# Altium PCB PCB6.pcbdoc
Units mm, origin at the board's own origin, x right, y up, seen from the top; angles counter-clockwise.
Board outline 54.88 x 39.8 mm, 2 copper layers (Top Layer, Bottom Layer); 33 components, 34 nets, 149 pads, 127 vias.
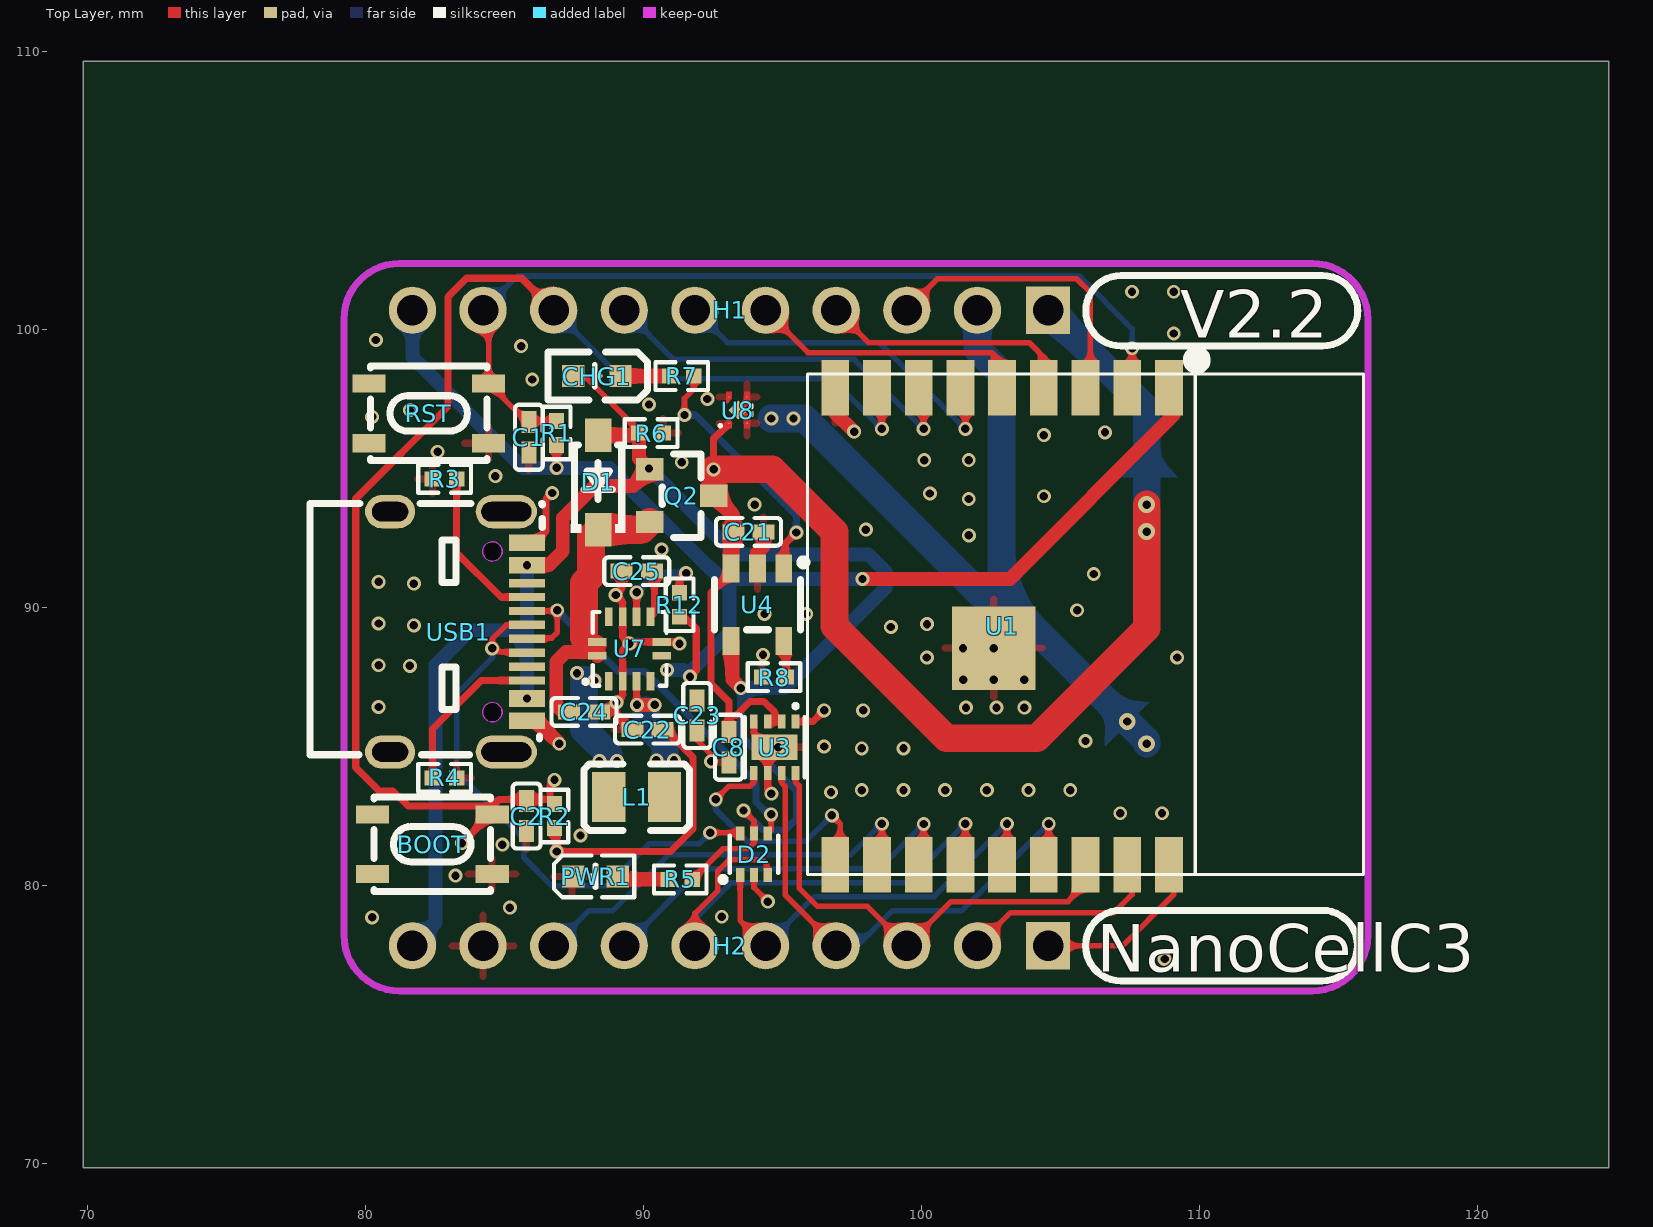
[diagram p0: Top Layer view]
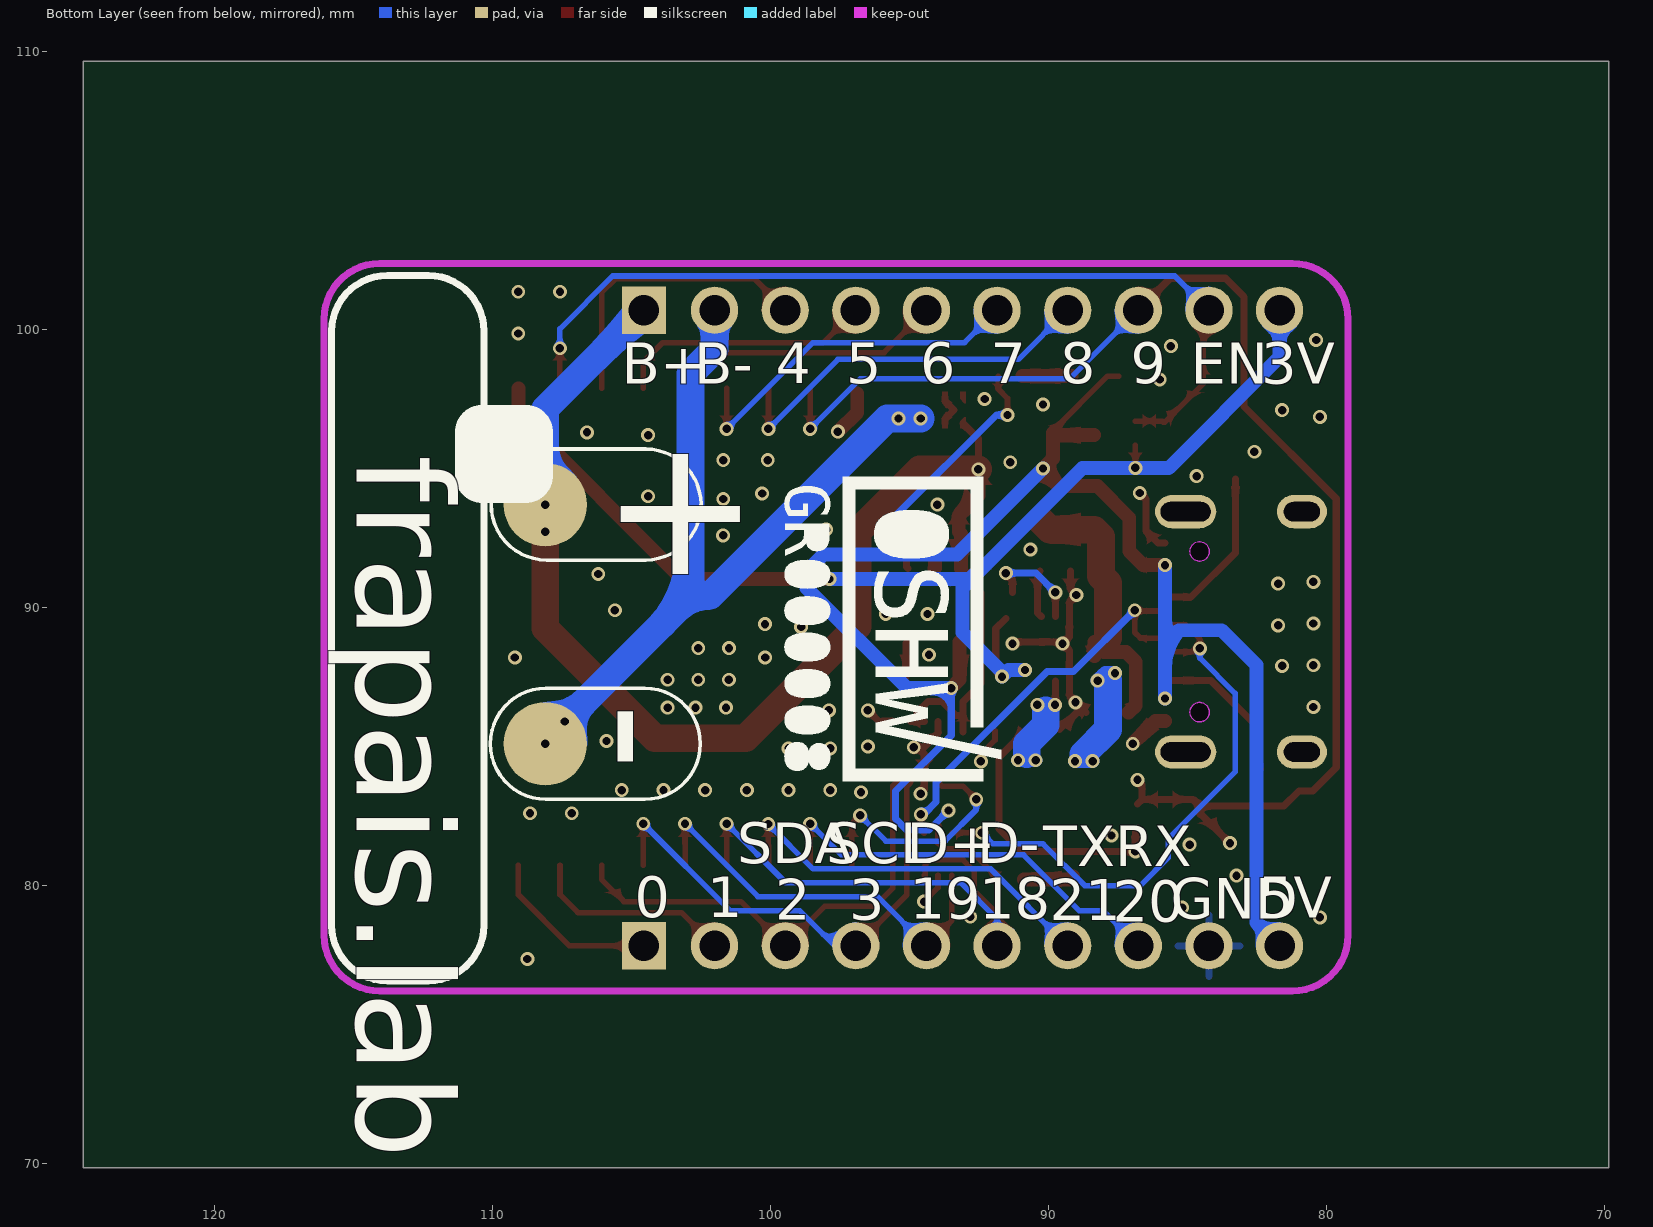
[diagram p1: Bottom Layer view, seen from below]

## Layer stack, top to bottom
Top Layer: signal copper (thickness not stored)
Dielectric: dielectric 0.32, FR-4, Dk 4.8
Bottom Layer: signal copper (thickness not stored)

## Board outline
124.731,69.85 69.85,69.85 69.85,109.65 124.731,109.65

## Design rules (kind name [scope] priority, off if disabled: settings)
BoardOutlineClearance copperThickness1oz [All] p0: genericclearance=0.254 ignorepadtopadclearanceinfootprint=FALSE except(0: Arc-SplitContinuation Track-SplitContinuation SMDPad-SplitContinuation THPad-SplitContinuation Via-SplitContinuation Fill-SplitContinuation Poly-SplitContinuation Region-SplitContinuation Text-SplitContinuation; 0.152: SMDPad-CutoutEdge THPad-CutoutEdge Via-CutoutEdge Fill-CutoutEdge Region-CutoutEdge; 0.3: Track-OutlineEdge SMDPad-OutlineEdge THPad-OutlineEdge Via-OutlineEdge Fill-OutlineEdge Region-OutlineEdge Poly-OutlineEdge Text-OutlineEdge Track-CutoutEdge)
BoardOutlineClearance copperThickness2oz [All] p0: genericclearance=0.254 ignorepadtopadclearanceinfootprint=FALSE except(0: Arc-SplitContinuation Track-SplitContinuation SMDPad-SplitContinuation THPad-SplitContinuation Via-SplitContinuation Fill-SplitContinuation Poly-SplitContinuation Region-SplitContinuation Text-SplitContinuation; 0.152: SMDPad-CutoutEdge THPad-CutoutEdge Via-CutoutEdge Fill-CutoutEdge Region-CutoutEdge; 0.3: Track-OutlineEdge SMDPad-OutlineEdge THPad-OutlineEdge Via-OutlineEdge Fill-OutlineEdge Region-OutlineEdge Poly-OutlineEdge Text-OutlineEdge Track-CutoutEdge)
Clearance copperThickness1oz [(InNet('GND') OR InNet('VCC') OR InNet('RX') OR InNet('TX') OR InNet('D-') OR InNet('D+') OR InNet('SCL') OR InNet('SDA') OR InNet('D01') OR InNet('D00') OR InNet('EN') OR InNet('D09') OR InNet('D08') OR InNet('D07') OR InNet('D06') OR InNet('D05') OR InNet('D04') OR InNet('B-') OR InNet('VBAT') OR InNet('ALRT') OR InNet('CHG2') OR InNet('VIN') OR InNet('DN1') OR InNet('DP1') OR InNet('PROG') OR InNet('CHG1') OR InNet('$1N6') OR InNet('$2N592') OR InNet('$2N589') OR InNet('$2N2104') OR InNet('$2N2094') OR InNet('3.3V') OR InNet('$2N2176') OR InNet('$2N2214'))] p1: gap=0.178 ignorepadtopadclearanceinfootprint=FALSE except(0.102: Track-Track; 0.152: Track-SMDPad SMDPad-SMDPad Track-THPad SMDPad-THPad THPad-THPad Track-Via SMDPad-Via THPad-Via Via-Via Track-Fill SMDPad-Fill THPad-Fill Via-Fill Fill-Fill SMDPad-Region THPad-Region Via-Region Fill-Region Region-Region Track-Poly SMDPad-Poly THPad-Poly Via-Poly Fill-Poly Poly-Poly Track-Text SMDPad-Text THPad-Text Via-Text Fill-Text Region-Text Poly-Text Text-Text Track-Hole SMDPad-Hole THPad-Hole Via-Hole Fill-Hole Region-Hole Poly-Hole Text-Hole; 0.3: Track-Region Region-Poly Track-Sheet SMDPad-Sheet THPad-Sheet Via-Sheet Fill-Sheet Region-Sheet Poly-Sheet Text-Sheet Sheet-Hole)
Clearance copperThickness2oz [All] p1: gap=0.178 ignorepadtopadclearanceinfootprint=FALSE except(0.152: Track-SMDPad SMDPad-SMDPad Track-THPad SMDPad-THPad THPad-THPad Track-Via SMDPad-Via THPad-Via Via-Via Track-Fill SMDPad-Fill THPad-Fill Via-Fill Fill-Fill SMDPad-Region THPad-Region Via-Region Fill-Region Region-Region Track-Poly SMDPad-Poly THPad-Poly Via-Poly Fill-Poly Poly-Poly Track-Text SMDPad-Text THPad-Text Via-Text Fill-Text Region-Text Poly-Text Text-Text Track-Hole SMDPad-Hole THPad-Hole Via-Hole Fill-Hole Region-Hole Poly-Hole Text-Hole; 0.203: Track-Track; 0.3: Track-Region Region-Poly Track-Sheet SMDPad-Sheet THPad-Sheet Via-Sheet Fill-Sheet Region-Sheet Poly-Sheet Text-Sheet Sheet-Hole)
DiffPairsRouting differentialPair [All] p1: maxuncoupledlength=10 minlimit=5.9843 maxlimit=5.9843 mostfreqgap=5.9843 toplayer_minwidth=5 toplayer_prefwidth=10 toplayer_maxwidth=100 bottomlayer_minwidth=5 bottomlayer_prefwidth=10 bottomlayer_maxwidth=100
PasteMaskExpansion pasteMaskExpansion [All] p1: expansion=0
PlaneConnect innerPlane [All] p1: planeconnectstyle=Relief reliefexpansion=0.508 reliefentries=4 reliefconductorwidth=0.254 reliefairgap=0.254
PolygonConnect copperRegion [All] p1: connectstyle=Relief reliefentries=4 reliefconductorwidth=10 polygonreliefangle="90 Angle" airgapwidth=10
PolygonConnect copperRegion1 [All] p1: connectstyle=Direct reliefentries=4 reliefconductorwidth=10 polygonreliefangle="90 Angle" airgapwidth=10
RoutingVias viaSize [All] p1: viastyle="Through Hole" holewidth=12.0078 minholewidth=11.811 maxholewidth=248.0314 width=24.0158 minwidth=19.685 maxwidth=393.7008
SolderMaskExpansion solderMaskExpansion [All] p1: useseparateexpansions=TRUE expansion=2.0079 expansionbottom=2.0079
Width copperThickness1oz [All] p1: maxlimit=100 minlimit=5 preferedwidth=10
Width copperThickness2oz [All] p1: maxlimit=100 minlimit=8 preferedwidth=10

## Components (designator, comment, footprint, x,y, rotation, side; value= is the part's Value field where it differs from the comment)
BOOT "TSA016A2518C" SW-SMD_4P-L4.2-W3.3-P2.15-LS4.6 82.412,81.483 r0 top
C1 "0402B104K160NT" C0402 85.882,96.119 r90 top
C2 "0402B104K160NT" C0402 85.805,82.496 r90 top
C8 "0402B104K160NT" C0402 93.075,84.97 r90 top
C21 "CL05A106MQ5NUNC" C0402 93.782,92.719 r180 top
C22 "CL05A106MQ5NUNC" C0402 90.154,85.605 r0 top
C23 "CL05A106MQ5NUNC" C0402 91.932,86.113 r90 top
C24 "CL05A106MQ5NUNC" C0402 87.868,86.24 r180 top
C25 "CC0402KRX7R9BB102" C0402 89.763,91.302 r0 top
CHG1 "MHT192CSCT" LED0603-R-RD_ORANGE 88.332,98.319 r180 top
D1 "B5819W SL" SOD-123_L2.7-W1.6-LS3.7-RD-1 88.376,94.495 r90 top
D2 "USBLC6-2P6" SOT-666-6_L1.6-W1.2-P0.50-LS1.6-BL 93.982,81.119 r0 top
H1 "DZ254R-11-10-63" HDR-TH_10P-P2.54-V-M 93.127,100.689 r180 top
H2 "DZ254R-11-10-63" HDR-TH_10P-P2.54-V-M 93.127,77.829 r180 top
L1 "DFE201610E-1R5M=P2" L0806 89.763,83.174 r180 top
PWR1 "E6C0603CWAY1UDA" LED0603-R-RD_WHITE 88.282,80.319 r0 top
Q2 "AO3401A_C15127" SOT-23_L2.9-W1.3-P1.90-LS2.4-BR 91.382,94.019 r180 top
R1 "RMS04FT1002" R0402 86.882,96.269 r270 top
R2 "RMS04FT1002" R0402 86.805,82.496 r270 top
R3 "0402WGJ0512TCE" R0402 82.855,94.621 r180 top
R4 "0402WGJ0512TCE" R0402 82.855,83.871 r180 top
R5 "0402WGF5100TCE" R0402 91.332,80.219 r180 top
R6 "RMS04FT1002" R0402 90.282,96.269 r180 top
R7 "0402WGF3300TCE" R0402 91.382,98.319 r0 top
R8 "WR04X2321FTL" R0402 94.705,87.496 r0 top
R12 "0402WGF1004TCE" R0402 91.305,90.096 r270 top
RST "TSA016A2518C" SW-SMD_4P-L4.2-W3.3-P2.15-LS4.6 82.285,96.977 r0 top
U1 "ESP32-C3-WROOM-02-N4_C2934560" FOOTPRINT-ESP32-C3-WROOM-02 108.905,97.896 r270 top
U3 "MAX17048G+T10" DFN-8_L2.0-W2.0-P0.50-BL-EP 94.726,84.97 r180 top
U4 "TP4065-4.2V-SOT25-R" SOT-23-5_L3.0-W1.7-P0.95-LS2.8-BR 94.105,90.096 r90 top
U7 "TPS63051RMWR" QFN-12_L2.5-W2.5-P0.50-TL 89.509,88.508 r90 top
U8 "AP6683" DFN-4_L1.0-W1.0-P0.65-BL-EP 93.405,97.096 r0 top
USB1 "U262-161N-4BVC11" USB-3.1-SMD_U262-161N-4BVC11 83.355,89.121 r270 top

## Footprints (in the part's own frame and the unit in brackets; to place one, negate y for a bottom-side part, rotate by r counter-clockwise, add the part's x,y. Pads: shape width x height; smd on the part's side, far side on the other; paste and mask are expansions set on the pad)
C0402 [mm]
  rect 0.79x0.54 smd: 1(-0.545,0) 2(0.545,0)
  silkscreen extent -1.17,-0.5 1.17,0.5
DFN-4_L1.0-W1.0-P0.65-BL-EP [mm]
  round 0.04 smd: 1(-0.325,-0.475) 2(0.325,-0.474) 3(0.325,0.475) 4(-0.325,0.475)
  rect 0.48x0.48 smd rot 45: 5(0.004,0.001)
  Top Layer region: 0.425,-0.649 0.225,-0.649 0.225,-0.399 0.225,-0.399 0.375,-0.249 0.425,-0.249
  Top Layer region: -0.225,-0.4 -0.225,-0.65 -0.425,-0.65 -0.425,-0.25 -0.375,-0.25
  Top Layer region: -0.425,0.651 -0.225,0.651 -0.225,0.401 -0.225,0.401 -0.375,0.251 -0.425,0.251
  Top Layer region: 0.425,0.651 0.225,0.651 0.225,0.401 0.225,0.401 0.375,0.251 0.425,0.251
  silkscreen extent -0.68,-0.61 0.5,0.21
DFN-8_L2.0-W2.0-P0.50-BL-EP [mm]
  rect 0.28x0.505 smd: 1(-0.75,-0.927) 2(-0.25,-0.927) 3(0.25,-0.927) 4(0.75,-0.927) 5(0.75,0.928) 6(0.25,0.928) 7(-0.25,0.928) 8(-0.75,0.928)
  rect 1.65x0.9 smd: 9(0,0)
  silkscreen extent -1.08,-1.55 1.08,1.08
FOOTPRINT-ESP32-C3-WROOM-02 [mm]
  rect 2x1 smd: 1(0,0) 2(0,-1.5) 3(0,-3) 4(0,-4.5) 5(0,-6) 6(0,-7.5) 7(0,-9) 8(0,-10.5) 9(0,-12) 10(17.15,-12) 11(17.15,-10.5) 12(17.15,-9) 13(17.15,-7.5) 14(17.15,-6) 15(17.15,-4.5) 16(17.15,-3) 17(17.15,-1.5) 18(17.15,0)
  rect 3x3 smd: 19(9.36,-6.3)
  silkscreen extent -1.25,-13 17.5,7
HDR-TH_10P-P2.54-V-M [mm]
  rect 1.575x1.7 hole 1.1: 1(-11.43,0)
  round 1.7 hole 1.1: 2(-8.89,0) 3(-6.35,0) 4(-3.81,0) 5(-1.27,0) 6(1.27,0) 7(3.81,0) 8(6.35,0) 9(8.89,0) 10(11.43,0)
L0806 [mm]
  rect 1.2x1.8 smd: 1(-1,0) 2(1,0)
  silkscreen extent -1.9,-1.2 1.9,1.2
LED0603-R-RD_ORANGE [mm]
  rect 0.8x0.8 smd: 1(0.851,0) 2(-0.851,0)
  silkscreen extent -1.82,-0.86 1.77,0.86
LED0603-R-RD_WHITE [mm]
  rect 0.8x0.8 smd: 1(0.8,0) 2(-0.8,0)
  silkscreen extent -1.49,-0.75 1.39,0.76
QFN-12_L2.5-W2.5-P0.50-TL [mm]
  rect 0.665x0.28 smd: 1(-1.157,0.75) 2(-1.157,0.25) 3(-1.157,-0.25) 4(-1.157,-0.75) 7(1.157,-0.75) 8(1.157,-0.25) 9(1.157,0.25) 10(1.157,0.75)
  rect 0.28x0.665 smd: 5(-0.25,-1.157) 6(0.25,-1.157) 11(0.25,1.157) 12(-0.25,1.157)
  silkscreen extent -1.33,-1.33 1.33,1.66
R0402 [mm]
  rect 0.566x0.54 smd: 1(-0.433,0) 2(0.433,0)
  silkscreen extent -0.94,-0.5 0.94,0.5
SOD-123_L2.7-W1.6-LS3.7-RD-1 [mm]
  rect 1.2x0.95 smd: 1(-1.7,0) 2(1.7,0)
  silkscreen extent -1.81,-0.98 1.35,0.98
SOT-23-5_L3.0-W1.7-P0.95-LS2.8-BR [mm]
  rect 1x0.6 smd: 1(1.3,-0.95) 2(1.3,0) 3(1.3,0.95) 4(-1.3,0.95) 5(-1.3,-0.95)
  silkscreen extent -0.9,-1.78 1.65,1.55
SOT-23_L2.9-W1.3-P1.90-LS2.4-BR [mm]
  rect 1x0.8 smd: 1(1.15,-0.95) 2(1.15,0.95) 3(-1.15,0)
  silkscreen extent -0.7,-1.5 0.7,1.5
SOT-666-6_L1.6-W1.2-P0.50-LS1.6-BL [mm]
  rect 0.3x0.5 smd: 1(-0.5,-0.75) 2(0,-0.75) 3(0.5,-0.75) 4(0.5,0.75) 5(0,0.75) 6(-0.5,0.75)
  silkscreen extent -1.21,-1.01 0.88,0.68
SW-SMD_4P-L4.2-W3.3-P2.15-LS4.6 [mm]
  rect 1.2x0.65 smd: 1(-2.15,1.075) 2(2.15,1.075) 3(-2.15,-1.075) 4(2.15,-1.075)
  silkscreen extent -2.1,-1.7 2.1,1.7
USB-3.1-SMD_U262-161N-4BVC11 [mm]
  rect 0.6x1.3 smd: A1B12(-3.2,2.461) A4B9(-2.4,2.461) B1A12(3.2,2.461) B4A9(2.4,2.461)
  rect 0.3x1.3 smd: A5(-1.25,2.461) A6(-0.25,2.461) A7(0.25,2.461) A8(1.25,2.461) B5(1.75,2.461) B6(0.75,2.461) B7(-0.75,2.461) B8(-1.75,2.461)
  oval 1.2x2.2 hole 0.7 slot 1.8 at 90 deg: SHELL(-4.32,1.719) SHELL(4.32,1.719)
  oval 1.2x1.8 hole 0.7 slot 1.3 at 90 deg: SHELL(-4.32,-2.461) SHELL(4.32,-2.461)
  Board Outline Layer circle w0.005: c2.89,1.219 r0.35
  Board Outline Layer circle w0.005: c-2.89,1.219 r0.35
  Board Outline Layer region: 2.89,1.569 3.042,1.534 3.164,1.437 3.231,1.297 3.231,1.141 3.164,1 3.042,0.903 2.89,0.869 2.89,0.869 2.738,0.903 2.616,1 2.549,1.141 2.549,1.297 2.616,1.437 2.738,1.534 2.89,1.569
  Board Outline Layer region: -2.89,1.569 -2.738,1.534 -2.616,1.437 -2.549,1.297 -2.549,1.141 -2.616,1 -2.738,0.903 -2.89,0.869 -2.89,0.869 -3.042,0.903 -3.164,1 -3.231,1.141 -3.231,1.297 -3.164,1.437 -3.042,1.534 -2.89,1.569
  Multi-Layer board cut-out: 2.89,1.569 3.042,1.534 3.164,1.437 3.231,1.297 3.231,1.141 3.164,1 3.042,0.903 2.89,0.869 2.89,0.869 2.738,0.903 2.616,1 2.549,1.141 2.549,1.297 2.616,1.437 2.738,1.534 2.89,1.569
  Multi-Layer board cut-out: -2.89,1.569 -2.738,1.534 -2.616,1.437 -2.549,1.297 -2.549,1.141 -2.616,1 -2.738,0.903 -2.89,0.869 -2.89,0.869 -3.042,0.903 -3.164,1 -3.231,1.141 -3.231,1.297 -3.164,1.437 -3.042,1.534 -2.89,1.569
  silkscreen extent -4.62,-5.35 4.42,3.01

## Free pads (board coordinates)
  round 3 smd far side: 1(108.105,93.696) 1(108.105,93.696) 2(108.105,85.096) 2(108.105,85.096)

## Via types
v1: diameter 0.5, hole 0.3, Top Layer to Bottom Layer, 123 vias
v2: diameter 0.61, hole 0.305, Top Layer to Bottom Layer, 4 vias

## Nets (pads, with @x,y where several pads share a name; then routed paths per layer and width w, separated by ;. In a path a pad name is that pad's centre, name@x,y a point inside that pad or via, vN(x,y) a via of type N, cw(c..) or ccw(c..) an arc to the next point about the centre after c; other vN are vias at no path point)
3.3V: C22.2 C23.2 H1.10 R1.2 R2.2 R12.2 U1.1 U7.4 U7.5 | length 54.3
  Top Layer w0.2: v1(86.882,95.019) R1.2
  Top Layer w0.254: R2.2 86.882,81.986 v1(86.882,81.219) 90.975,81.219 91.783,82.028 91.783,84.61 90.789,85.605 C22.2 ; R12.2@91.541,89.599 91.905,89.235 91.905,87.737 v1(91.678,87.51)
  Top Layer w0.5: v1(97.882,91.019) 103.182,91.019 109.076,96.913 U1.1@109.076,97.879
  Bottom Layer w0.5: H1.10 81.697,99.005 85.682,95.019 v1(86.882,95.019) ; v1(86.882,95.019) 88.782,95.019 92.782,91.019 ; v1(90.855,87.746) 91.442,87.746 v1(91.678,87.51) 91.678,87.669 93.105,89.096 93.105,90.696 92.782,91.019 ; v1(97.882,91.019) 92.782,91.019
$1N6: PWR1.1 R5.2 | length 1.8
  Top Layer w0.5: PWR1.1@89.133,80.319 89.233,80.219 R5.2
$2N589: R3.1 USB1.A5 | length 5.8
  Top Layer w0.254: R3.1 83.288,91.963 84.88,90.371 USB1.A5
$2N592: R4.2 USB1.B5 | length 5.9
  Top Layer w0.254: R4.2 82.422,85.62 84.173,87.371 USB1.B5
$2N2094: L1.1 U7.3 | length 4
  Top Layer w0.254: v1@89.759,86.48 U7.3
  Top Layer w0.3: v1@89.759,86.48 v1(89.773,86.494)
  Top Layer w0.5: v1(89.773,86.494) v1(90.408,86.494)
  Bottom Layer w0.5: v1(90.47,84.501) v1(91.105,84.501)
  Bottom Layer w1: 90.105,86.296 90.105,85.781 90.789,85.097 90.789,84.716
$2N2104: L1.2 U7.1 | length 4.4
  Bottom Layer w0.5: v1(87.614,87.637) 87.967,87.637 v1(88.239,87.365) ; v1(88.42,84.472) v1(89.055,84.472)
  Bottom Layer w1: 87.868,87.383 87.868,85.605 88.757,84.716
$2N2176: R12.1 U7.8 | length 3.7
  Top Layer w0.254: U7.8 89.759,90.536 v1(89.763,90.54) ; R12.1 91.305,90.996 v1(91.541,91.232)
  Bottom Layer w0.254: v1(89.763,90.54) 90.455,91.232 v1(91.541,91.232)
$2N2214: C25.2 U7.7 | length 1.7
  Top Layer w0.254: U7.7 90.398,89.804 90.398,91.212 C25.2
ALRT: U1.10 U3.5 | length 9.3
  Top Layer w0.2: v1(92.605,83.096) 93.082,83.573 93.837,83.573 93.976,83.712 U3.5 ; v1(96.782,82.519) 97.077,82.224 U1.10@97.077,80.728
  Bottom Layer w0.2: v1(92.605,83.096) 92.605,82.721 93.73,81.596 95.859,81.596 v1(96.782,82.519)
B-: H1.2 pad.2 U8.2 U8.3 U8.5 | length 30.2
  Top Layer w0.254: U8.2 93.73,96.776 U8.5 93.73,97.417 U8.3
  Bottom Layer w1: v1(94.605,96.796) v1(95.405,96.796) 95.805,96.796 102.181,90.419 102.883,90.419 ; H1.2 102.017,99.274 102.883,98.408 102.883,90.419 ; v2(108.105,85.096) 108.105,85.197 107.406,85.897 102.883,90.419
  other v2: 107.405,85.896
CHG1: R7.2 U4.1 | length 9.1
  Top Layer w0.2: v1(91.482,96.919) 91.482,97.519 91.815,97.852 R7.2
  Top Layer w0.254: U4.1 95.107,91.448 95.107,92.298 v1(95.505,92.696)
  Bottom Layer w0.254: v1(91.482,96.919) 91.882,96.919 95.505,93.296 v1(95.505,92.696)
CHG2: CHG1.2 R7.1 | length 1.8
  Top Layer w0.5: CHG1.2 R7.1
D00: H2.1 U1.18 | length 6.3
  Top Layer w0.2: H2.1 107.237,77.829 109.077,79.668 U1.18@109.077,80.728
D01: H2.2 U1.17 | length 7.4
  Top Layer w0.2: H2.2 103.208,79.02 106.929,79.02 107.577,79.668 U1.17@107.577,80.729
D04: H1.3 U1.3 | length 10.7
  Top Layer w0.2: H1.3 99.477,100.714 100.582,101.819 105.582,101.819 106.077,101.324 U1.3@106.077,97.878
D05: H1.4 U1.4 | length 9.4
  Top Layer w0.2: H1.4 98.106,99.519 103.882,99.519 104.577,98.824 U1.4@104.577,97.878
D06: H1.5 U1.5 | length 10.3
  Top Layer w0.2: H1.5 95.92,99.165 102.536,99.165 103.077,98.624 U1.5@103.077,97.878
D07: H1.6 U1.6 | length 13
  Top Layer w0.2: U1.6@101.577,97.879 v1(101.582,96.419)
  Bottom Layer w0.2: H1.6 93.028,99.52 98.481,99.52 v1(101.582,96.419)
D08: H1.7 U1.7 | length 14
  Top Layer w0.2: U1.7@100.077,97.878 100.077,96.424 v1(100.082,96.419)
  Bottom Layer w0.2: H1.7 91.087,98.918 97.582,98.918 v1(100.082,96.419)
D09: BOOT.2 C2.2 H1.8 R2.1 U1.8 | length 48.4
  Top Layer w0.2: U1.8@98.577,97.878 98.577,96.424 v1(98.582,96.419)
  Top Layer w0.254: v1(83.482,81.519) 84.521,82.558 BOOT.2 BOOT.2@84.562,82.853 ; H1.8 85.629,101.836 83.645,101.836 82.979,101.17 82.979,97.226 79.659,93.906 79.659,84.242 80.505,83.396 81.005,83.396 81.548,82.853 BOOT.2@84.562,82.853 ; R2.1 R2.1@86.638,83.096 ; v1(86.805,83.799) 86.638,83.631 R2.1@86.638,83.096 ; BOOT.2@84.562,82.853 84.805,83.096 R2.1@86.638,83.096
  Bottom Layer w0.2: H1.8 89.246,98.22 96.782,98.22 v1(98.582,96.419)
D+: D2.1 H2.5 U1.14 | length 14.9
  Top Layer w0.2: D2.1 93.482,78.744 H2.5 ; U1.14@103.076,80.729 v1(103.082,82.219)
  Bottom Layer w0.2: H2.5 96.164,79.596 100.46,79.596 v1(103.082,82.219)
D-: D2.3 H2.6 U1.13 | length 19.1
  Top Layer w0.2: H2.6 91.857,78.994 92.682,79.82 92.682,80.518 93.084,80.92 94.283,80.92 94.432,80.77 94.432,80.369 D2.3@94.481,80.369 ; U1.13@101.577,80.729 v1(101.582,82.219)
  Bottom Layer w0.2: H2.6 91.857,78.794 93.159,80.096 99.458,80.096 v1(101.582,82.219)
DN1: D2.4 USB1.A7 USB1.B7 | length 15
  Top Layer w0.2: USB1.A7 85.841,88.896 86.705,88.896 86.905,89.096 v1(86.905,89.896) 86.88,89.871 USB1.B7 ; D2.4 94.599,81.986 v1(94.599,82.557)
  Bottom Layer w0.254: v1(86.905,89.896) 89.105,87.696 90.055,87.696 94.055,83.696 94.055,82.996 94.494,82.557 v1(94.599,82.557)
DP1: D2.6 USB1.A6 USB1.B6 | length 21.2
  Top Layer w0.2: USB1.B6 85.788,88.399 84.693,88.399 v1(84.566,88.526) 84.566,88.863 85.074,89.371 USB1.A6 ; v1(92.405,81.896) 93.455,81.896 D2.6
  Bottom Layer w0.2: v1(84.566,88.526) 84.566,88.176 83.296,86.906 83.296,84.081 85.705,81.672 85.705,80.996 86.705,79.996 88.705,79.996 90.205,81.496 92.005,81.496 v1(92.405,81.896)
EN: C1.2 H1.9 R1.1 RST.2 U1.2 | length 32.5
  Top Layer w0.2: H1.9 84.435,100.491 RST.2 85.823,96.664 C1.2 85.92,96.702 R1.1 ; U1.2@107.577,97.878 107.582,97.883 v1(107.582,99.319)
  Bottom Layer w0.2: H1.9 85.467,101.919 105.682,101.919 107.582,100.019 v1(107.582,99.319)
GND: BOOT.4 C1.1 C2.1 C8.1 C21.1 C22.1 C23.1 C24.1 C25.1 D2.2 H2.9 PWR1.2 R3.2 R4.1 R6.1 R8.1 RST.4 U1.9 U1.19 U3.1 U3.4 U3.6 U3.9 U4.2 U7.2 U7.6 U7.9 U8.4 USB1.A1B12 USB1.B1A12 | length 22.6
  Top Layer w0.2: C23.1 91.932,85.224 92.44,84.716 v1(92.44,84.462) ; D2.2 93.982,79.919 v1(94.482,79.419)
  Top Layer w0.254: USB1.A1B12 86.075,92.321 86.505,92.751 86.505,93.894 v1(86.725,94.114) ; C24.1@88.657,86.222 C24.1@88.675,86.24 ; C25.1 89.218,90.659 v1(89.005,90.446) 89.259,90.192 U7.9 89.259,88.942 v1(89.505,88.696) ; C22.1 88.974,86.24 C24.1@88.675,86.24 ; v1(91.305,88.696) 91.243,88.758 U7.6 89.567,88.758 v1(89.505,88.696) ; U3.4 93.976,85.478 94.484,84.97 U3.9 94.476,84.72 U3.6 94.476,83.425 v1(94.605,83.296) ; U3.1 96.106,85.898 v1(96.505,86.296) ; C24.1@88.675,86.24 89.259,86.824 U7.2 89.259,88.45 v1(89.505,88.696)
  Top Layer w0.5: USB1.B1A12 86.155,85.921 v1(86.979,85.097) ; U4.2 94.091,91.41 94.091,91.955 94.327,92.191 C21.1 ; U1.9@96.885,97.686 96.885,97.016 v1(97.582,96.319)
  other v1: 108.749,77.352 80.249,78.852 92.821,78.874 85.2,79.2 83.249,80.352 84.932,81.469 87.741,81.795 107.155,82.596 108.655,82.596 96.749,83.352 97.856,83.428 99.356,83.428 100.856,83.428 102.356,83.428 103.856,83.428 105.356,83.428 97.856,84.928 99.356,84.928 94.853,84.97 96.505,84.996 105.905,85.196 97.905,86.296 101.605,86.396 102.705,86.396 103.705,86.396 80.482,86.419 89.037,86.586 101.505,87.396 102.605,87.396 103.705,87.396 81.605,87.896 80.482,87.919 100.2,88.2 109.2,88.2 94.305,88.296 101.501,88.536 102.605,88.536 98.905,89.296 81.749,89.352 80.482,89.419 100.205,89.396 94.361,89.762 95.86,89.762 105.605,89.896 81.749,90.852 80.482,90.919 106.2,91.2 90.662,92.082 101.711,92.59 98.005,92.796 94.005,93.696 101.705,93.896 104.405,93.996 100.305,94.096 84.682,94.719 91.382,95.219 100.105,95.296 101.705,95.296 82.605,95.596 104.405,96.196 106.605,96.296 80.249,96.852 81.605,97.096 90.205,97.296 92.305,97.496 86.005,98.196 85.605,99.396 80.382,99.619 109.078,99.852 107.578,101.352 109.078,101.352
PROG: R8.2 U4.5 | length 1.3
  Top Layer w0.254: U4.5 95.138,88.713 R8.2
RX: H2.8 U1.11 | length 15.1
  Top Layer w0.2: U1.11@98.577,80.728 98.582,80.733 v1(98.582,82.219)
  Bottom Layer w0.2: H2.8 88.044,79.096 88.905,79.096 90.905,81.096 97.459,81.096 v1(98.582,82.219)
SCL: H2.4 U1.15 U3.7 | length 18
  Top Layer w0.2: U3.7 94.976,83.69 95.107,83.559 95.107,79.659 H2.4 ; U1.15@104.577,80.729 v1(104.582,82.219)
  Bottom Layer w0.2: H2.4 97.691,77.829 98.959,79.096 101.459,79.096 v1(104.582,82.219)
SDA: H2.3 U1.16 U3.8 | length 17
  Top Layer w0.2: U3.8 95.476,83.712 95.603,83.585 95.603,79.902 96.25,79.255 98.05,79.255 H2.3 101.067,79.419 105.282,79.419 106.077,80.214 U1.16@106.077,80.728
TX: H2.7 U1.12 | length 14.1
  Top Layer w0.2: U1.12@100.076,80.729 v1(100.087,82.21)
  Bottom Layer w0.2: H2.7 92.084,80.596 98.476,80.596 v1(100.087,82.21)
VBAT: C8.2 C21.2 H1.1 pad.1 Q2.3 U3.2 U3.3 U4.3 U8.1 | length 51.2
  Top Layer w0.254: v1(92.532,94.966) 92.532,96.072 U8.1 ; C8.2 93.075,86.113 ; U4.3 93.155,91.242 92.44,90.527 92.44,87.256 93.075,86.621 93.075,86.113 ; U3.3 U3.2 ; 94.726,85.898 94.726,86.24 94.345,86.621 93.837,86.621 93.329,86.113 93.075,86.113
  Top Layer w0.5: v1(92.532,94.966) Q2.3 93.237,93.314 C21.2 93.155,92.637 U4.3
  Top Layer w1: v1(92.532,94.966) 94.635,94.966 96.882,92.719 96.881,89.32 100.905,85.296 104.154,85.296 108.105,89.246 v2(108.105,92.722) v2(108.105,93.696)
  Bottom Layer w1: H1.1 108.105,97.141 v2(108.105,93.696)
VCC: CHG1.1 D1.2 D2.5 H2.10 Q2.1 R5.1 R6.2 U4.4 USB1.A4B9 USB1.B4A9 | length 63.2
  Top Layer w0.2: CHG1.1 87.882,98.319 89.849,96.352 R6.2 ; R5.1 92.865,81.319 93.782,81.319 93.982,81.519 D2.5 ; v1(93.605,82.696) 93.983,82.317 D2.5
  Top Layer w0.5: v1(85.816,91.521) 86.605,91.521 87.105,92.021 87.105,93.224 88.249,94.368 89.631,94.368 Q2.1 89.849,95.352 R6.2 89.775,96.195 D1.2 ; U4.4 93.202,88.749 93.202,87.399 v1(93.505,87.096)
  Bottom Layer w0.254: v1(93.505,87.096) 93.505,85.396 95.505,83.396 95.505,82.396 95.105,81.996 94.305,81.996 v1(93.605,82.696)
  Bottom Layer w0.5: H2.10 82.534,78.665 82.534,87.925 83.787,89.178 85.31,89.178 85.816,88.673 ; v1(85.816,86.721) 85.816,88.673 ; v1(85.816,91.521) 85.816,88.673 ; v1(90.205,94.996) 93.305,91.896 98.105,91.896 98.705,91.296 98.705,90.696 95.105,87.096 v1(93.505,87.096)
VIN: C24.2 D1.1 Q2.2 U7.11 U7.12 | length 9.8
  Top Layer w0.5: C24.2@87.124,86.222 86.868,86.478 86.868,88.034 87.227,88.393 88.005,88.393 ; U7.12 U7.11
  Top Layer w1: 87.868,88.907 87.868,90.873 88.122,91.127 88.122,92.541 D1.1 89.958,92.795 Q2.2
pads on no net: BOOT.1 BOOT.3 RST.1 RST.3 U7.10 USB1.A8 USB1.B8 USB1.SHELL

## Polygon pours and split planes (outlines as drawn)
$2N2104 on Top Layer (solid, remove dead copper, pour order 0): 87.219,87.873 89.001,87.873 89.001,86.909 87.219,86.909
$2N2104 on Top Layer (solid, remove dead copper, pour order 4): 87.999,84.809 89.509,84.809 89.509,82.158 87.999,82.158
$2N2094 on Top Layer (solid, remove dead copper, pour order 6): 90.021,84.809 91.531,84.809 91.531,82.158 90.021,82.158
B- on Top Layer (solid, remove dead copper, pour order 10): 93.005,98.896 95.705,98.896 95.705,95.396 93.005,95.396
VBAT on Top Layer (solid, remove dead copper, pour order 12): 91.967,96.937 93.405,96.937 93.405,93.895 91.967,93.895
GND on Bottom Layer (solid, remove dead copper, pour order 16): 77.09,103.3 110.19,103.2 110.19,76.2 79.19,76.2
3.3V on Top Layer (solid, remove dead copper, pour order 2): 90.017,88.416 91.76,88.416 92.684,87.492 92.684,86.195 92.584,86.095 91.966,86.095 91.804,85.933 91.804,85.224 91.541,84.961 90.769,84.961 90.525,85.206 90.525,85.968 90.779,86.222 90.779,86.723 90.15,86.723 90.017,86.857
VIN on Top Layer (solid, remove dead copper, pour order 8): 88.759,89.871 88.759,87.873 87.219,87.873 87.219,86.909 88.141,86.909 88.173,86.877 88.173,85.533 86.797,85.533 86.725,85.605 86.725,89.796 86.65,89.871
GND on Top Layer (solid, remove dead copper, pour order 14): 77.09,103.3 110.19,103.2 110.19,76.2 76.2,76.2

## Keep-outs
Board Outline Layer:
  lines w0.254: 79.232,78.207 ccw(c81.232,78.207) 81.232,76.207 114.062,76.207 ccw(c114.062,78.207) 116.062,78.207 116.062,100.369 ccw(c114.062,100.369) 114.062,102.369 81.232,102.369 ccw(c81.232,100.369) 79.232,100.369 79.232,78.207

## Other copper
Top Layer:
  drawing of 161 lines, arcs and shapes, not listed
Bottom Layer:
  region net VBAT: 108.605,95.738 107.605,95.738 107.603,95.673 107.597,95.611 107.587,95.552 107.574,95.496 107.557,95.442 107.538,95.39 107.515,95.34 107.49,95.292 107.452,95.229 107.41,95.169 107.352,95.095 107.25,94.979 106.98,94.688 109.23,94.688 108.946,94.993 108.858,95.095 108.8,95.169 108.758,95.229 108.72,95.292 108.695,95.34 108.672,95.39 108.652,95.442 108.636,95.496 108.623,95.552 108.613,95.611 108.607,95.673
  region net B-: 107.065,86.944 106.358,86.237 106.407,86.185 106.449,86.133 106.486,86.081 106.507,86.047 106.526,86.013 106.542,85.978 106.556,85.944 106.574,85.891 106.588,85.839 106.598,85.786 106.606,85.732 106.611,85.658 106.613,85.545 106.603,85.213 106.605,85.051 106.608,85.002 108.199,86.593 107.868,86.619 107.735,86.638 107.623,86.659 107.532,86.682 107.461,86.704 107.392,86.73 107.325,86.76 107.276,86.786 107.228,86.814 107.182,86.845 107.137,86.88 107.093,86.917
  region net B-: 107.065,86.944 106.358,86.237 106.407,86.185 106.449,86.133 106.486,86.081 106.507,86.047 106.526,86.013 106.542,85.978 106.556,85.944 106.574,85.891 106.588,85.839 106.598,85.786 106.606,85.732 106.611,85.658 106.613,85.545 106.603,85.213 106.605,85.051 106.608,85.002 108.199,86.593 107.868,86.619 107.735,86.638 107.623,86.659 107.532,86.682 107.461,86.704 107.392,86.73 107.325,86.76 107.276,86.786 107.228,86.814 107.182,86.845 107.137,86.88 107.093,86.917
  region net VBAT: 108.605,95.738 107.605,95.738 107.603,95.673 107.597,95.611 107.587,95.552 107.574,95.496 107.557,95.442 107.538,95.39 107.515,95.34 107.49,95.292 107.452,95.229 107.41,95.169 107.352,95.095 107.25,94.979 106.98,94.688 109.23,94.688 108.946,94.993 108.858,95.095 108.8,95.169 108.758,95.229 108.72,95.292 108.695,95.34 108.672,95.39 108.652,95.442 108.636,95.496 108.623,95.552 108.613,95.611 108.607,95.673
  region net VCC: 82.692,78.47 82.338,78.824 82.309,78.796 82.28,78.773 82.251,78.752 82.232,78.74 82.213,78.73 82.193,78.72 82.164,78.708 82.135,78.698 82.105,78.691 82.074,78.685 82.033,78.68 81.981,78.677 81.835,78.679 81.697,78.679 81.644,78.677 82.545,77.775 82.548,77.868 82.545,78.069 82.546,78.134 82.55,78.175 82.554,78.206 82.559,78.236 82.567,78.266 82.577,78.296 82.589,78.325 82.598,78.344 82.609,78.364 82.62,78.383 82.641,78.412 82.665,78.441
  region net RX: 87.666,78.576 87.524,78.717 87.51,78.705 87.494,78.693 87.476,78.684 87.457,78.675 87.437,78.668 87.415,78.661 87.391,78.656 87.342,78.649 87.289,78.646 87.205,78.645 87.058,78.655 86.81,78.676 86.743,78.678 86.724,78.677 87.625,77.775 87.626,77.816 87.623,77.887 87.598,78.168 87.593,78.285 87.594,78.341 87.598,78.394 87.605,78.443 87.61,78.466 87.616,78.488 87.623,78.509 87.632,78.528 87.642,78.546 87.653,78.562
  region net TX: 90.206,78.576 90.064,78.718 90.05,78.705 90.034,78.694 90.016,78.684 89.997,78.675 89.977,78.668 89.955,78.662 89.931,78.656 89.882,78.649 89.829,78.646 89.745,78.645 89.598,78.655 89.35,78.676 89.283,78.678 89.264,78.677 90.165,77.775 90.166,77.816 90.163,77.887 90.138,78.168 90.133,78.285 90.134,78.341 90.138,78.394 90.145,78.443 90.15,78.466 90.156,78.488 90.163,78.509 90.172,78.528 90.182,78.546 90.193,78.562
  region net D-: 91.957,78.794 91.757,78.794 91.756,78.775 91.752,78.757 91.747,78.74 91.739,78.724 91.73,78.709 91.719,78.694 91.706,78.68 91.692,78.666 91.676,78.653 91.641,78.629 91.602,78.606 91.539,78.573 91.382,78.5 91.319,78.467 91.281,78.443 91.264,78.431 91.248,78.418 91.233,78.405 91.219,78.391 92.494,78.391 92.481,78.405 92.466,78.418 92.45,78.431 92.414,78.455 92.375,78.478 92.288,78.521 92.132,78.595 92.092,78.617 92.054,78.641 92.038,78.653 92.022,78.666 92.008,78.68 91.995,78.694 91.984,78.709 91.974,78.724 91.967,78.74 91.961,78.757 91.958,78.775
  region net D+: 95.286,78.576 95.144,78.718 95.13,78.705 95.114,78.694 95.096,78.684 95.077,78.675 95.057,78.668 95.035,78.662 95.011,78.656 94.962,78.649 94.909,78.646 94.825,78.645 94.678,78.655 94.43,78.676 94.363,78.678 94.344,78.677 95.245,77.775 95.246,77.816 95.243,77.887 95.218,78.168 95.213,78.285 95.214,78.341 95.218,78.394 95.225,78.443 95.23,78.466 95.236,78.488 95.243,78.509 95.252,78.528 95.262,78.546 95.273,78.562
  region net SCL: 98.203,78.199 98.062,78.34 98.048,78.328 98.034,78.316 98.02,78.306 98.006,78.297 97.991,78.29 97.976,78.283 97.961,78.278 97.945,78.274 97.93,78.271 97.914,78.268 97.898,78.267 97.881,78.267 97.865,78.268 97.831,78.272 97.796,78.28 97.761,78.29 97.725,78.304 97.67,78.328 97.594,78.367 97.338,78.518 97.218,78.585 97.158,78.614 97.098,78.638 97.058,78.652 97.019,78.663 96.98,78.671 96.941,78.676 96.903,78.678 96.884,78.677 97.785,77.775 97.789,77.814 97.793,77.838 97.797,77.859 97.803,77.879 97.809,77.897 97.817,77.914 97.825,77.929 97.834,77.943 97.843,77.956 97.854,77.968 97.865,77.979 97.877,77.989 97.889,77.998 97.909,78.011 97.937,78.027 98.026,78.072 98.07,78.096 98.107,78.12 98.135,78.14 98.164,78.163 98.193,78.189
  region net 3.3V: 81.447,99.531 81.947,99.531 81.948,99.571 81.952,99.608 81.958,99.643 81.963,99.665 81.969,99.687 81.976,99.707 81.989,99.736 82.003,99.764 82.018,99.79 82.036,99.816 82.061,99.848 82.096,99.888 82.201,99.99 82.298,100.087 82.334,100.126 81.059,100.126 81.123,100.059 81.267,99.919 81.312,99.872 81.339,99.84 81.358,99.816 81.375,99.79 81.391,99.764 81.405,99.736 81.417,99.707 81.425,99.687 81.431,99.665 81.436,99.643 81.442,99.608 81.446,99.571
  region net EN: 85.126,101.436 84.984,101.578 84.97,101.565 84.954,101.554 84.936,101.544 84.917,101.535 84.897,101.528 84.875,101.522 84.851,101.516 84.802,101.509 84.749,101.506 84.665,101.505 84.518,101.515 84.27,101.536 84.203,101.538 84.184,101.537 85.085,100.635 85.086,100.676 85.083,100.747 85.058,101.028 85.053,101.145 85.054,101.201 85.058,101.254 85.065,101.303 85.07,101.326 85.076,101.348 85.083,101.369 85.092,101.388 85.102,101.406 85.113,101.422
  region net D09: 87.524,99.799 87.666,99.941 87.653,99.955 87.642,99.971 87.632,99.989 87.623,100.008 87.616,100.029 87.61,100.051 87.605,100.074 87.598,100.123 87.594,100.176 87.594,100.261 87.603,100.408 87.625,100.655 87.626,100.722 87.625,100.742 86.724,99.84 86.765,99.839 86.835,99.842 87.117,99.867 87.233,99.872 87.289,99.871 87.342,99.868 87.391,99.861 87.415,99.856 87.437,99.849 87.457,99.842 87.476,99.833 87.494,99.823 87.51,99.812
  region net D08: 90.064,99.799 90.206,99.941 90.193,99.955 90.182,99.971 90.172,99.989 90.163,100.008 90.156,100.029 90.15,100.051 90.145,100.074 90.138,100.123 90.134,100.176 90.134,100.261 90.143,100.408 90.165,100.655 90.166,100.722 90.165,100.742 89.264,99.84 89.305,99.839 89.375,99.842 89.657,99.867 89.773,99.872 89.829,99.871 89.882,99.868 89.931,99.861 89.955,99.856 89.977,99.849 89.997,99.842 90.016,99.833 90.034,99.823 90.05,99.812
  region net D07: 92.605,99.8 92.747,99.942 92.734,99.956 92.723,99.972 92.713,99.99 92.704,100.009 92.697,100.03 92.691,100.052 92.685,100.075 92.678,100.124 92.675,100.177 92.674,100.262 92.683,100.409 92.705,100.656 92.706,100.723 92.705,100.743 91.805,99.84 91.845,99.839 91.916,99.842 92.198,99.867 92.314,99.873 92.37,99.872 92.423,99.868 92.472,99.861 92.496,99.856 92.517,99.85 92.538,99.843 92.557,99.834 92.575,99.824 92.591,99.813
  region net B-: 101.517,99.531 102.517,99.531 102.52,99.733 102.526,99.811 102.534,99.868 102.542,99.905 102.552,99.942 102.565,99.977 102.579,100.012 102.597,100.046 102.617,100.079 102.641,100.111 102.654,100.126 101.379,100.126 101.405,100.095 101.427,100.062 101.446,100.029 101.462,99.995 101.476,99.96 101.487,99.924 101.496,99.887 101.505,99.83 101.512,99.773 101.516,99.674
  region net VBAT: 105.76,98.778 106.405,99.548 cw(c115.083,108.225) 105.344,100.757 104.551,99.838 cw(c97.083,90.1)
  region net D09: 98.412,96.731 98.271,96.589 98.287,96.571 98.3,96.55 98.31,96.527 98.318,96.504 98.323,96.479 98.328,96.454 98.332,96.403 98.597,96.669 98.547,96.673 98.522,96.678 98.498,96.684 98.474,96.692 98.452,96.702 98.431,96.715
  region net D08: 99.912,96.73 99.77,96.589 99.786,96.57 99.799,96.549 99.809,96.527 99.817,96.503 99.823,96.479 99.827,96.453 99.832,96.403 100.098,96.669 100.047,96.673 100.022,96.677 99.997,96.683 99.974,96.691 99.951,96.701 99.93,96.714
  region net D07: 101.412,96.731 101.271,96.589 101.287,96.571 101.299,96.55 101.31,96.527 101.317,96.504 101.323,96.479 101.327,96.454 101.332,96.403 101.597,96.669 101.547,96.673 101.522,96.678 101.498,96.684 101.474,96.692 101.451,96.702 101.431,96.715
  region net RX: 98.27,82.049 98.412,81.908 98.43,81.924 98.451,81.936 98.474,81.947 98.497,81.955 98.522,81.96 98.547,81.965 98.597,81.969 98.332,82.235 98.327,82.184 98.323,82.159 98.317,82.135 98.309,82.111 98.299,82.088 98.286,82.068
  region net TX: 99.775,82.04 99.917,81.899 99.936,81.915 99.957,81.927 99.979,81.938 100.003,81.945 100.027,81.951 100.052,81.955 100.103,81.96 99.837,82.225 99.833,82.175 99.828,82.15 99.822,82.125 99.814,82.102 99.804,82.079 99.791,82.058
  region net D-: 101.27,82.049 101.412,81.908 101.43,81.924 101.451,81.937 101.474,81.947 101.497,81.955 101.522,81.96 101.547,81.965 101.597,81.969 101.332,82.235 101.327,82.184 101.323,82.159 101.317,82.135 101.309,82.111 101.299,82.089 101.286,82.068
  region net D+: 102.77,82.05 102.911,81.908 102.93,81.925 102.951,81.937 102.973,81.948 102.997,81.955 103.022,81.961 103.072,81.968 103.098,81.969 102.832,82.234 102.827,82.185 102.823,82.16 102.817,82.135 102.809,82.111 102.798,82.089 102.785,82.068
  region net SCL: 104.27,82.049 104.412,81.908 104.43,81.923 104.451,81.936 104.474,81.947 104.497,81.954 104.522,81.96 104.547,81.965 104.597,81.969 104.332,82.235 104.327,82.184 104.323,82.159 104.317,82.135 104.309,82.111 104.299,82.088 104.286,82.068
  region net EN: 107.682,99.659 107.482,99.659 107.48,99.635 107.474,99.611 107.466,99.588 107.454,99.566 107.441,99.544 107.426,99.523 107.394,99.484 107.769,99.484 107.737,99.523 107.722,99.544 107.709,99.566 107.698,99.588 107.689,99.611 107.684,99.635
  region net VCC: 93.378,86.756 93.632,86.756 93.633,86.777 93.636,86.8 93.642,86.824 93.649,86.848 93.658,86.872 93.668,86.894 93.68,86.914 93.692,86.931 93.317,86.931 93.33,86.914 93.342,86.894 93.352,86.872 93.361,86.848 93.368,86.824 93.373,86.8 93.377,86.777
  region net CHG1: 91.822,96.792 91.822,97.046 91.801,97.047 91.778,97.05 91.754,97.056 91.73,97.063 91.706,97.072 91.684,97.082 91.664,97.094 91.647,97.106 91.647,96.731 91.664,96.744 91.684,96.756 91.706,96.766 91.73,96.775 91.754,96.782 91.778,96.787 91.801,96.791
  region net CHG1: 95.632,93.036 95.378,93.036 95.377,93.015 95.373,92.992 95.368,92.968 95.361,92.944 95.352,92.92 95.342,92.898 95.33,92.878 95.317,92.861 95.692,92.861 95.68,92.878 95.668,92.898 95.658,92.92 95.649,92.944 95.642,92.968 95.636,92.992 95.633,93.015
  region net VCC: 93.756,82.365 93.935,82.545 93.921,82.561 93.907,82.579 93.894,82.6 93.882,82.623 93.872,82.645 93.863,82.668 93.857,82.691 93.854,82.712 93.589,82.446 93.61,82.444 93.632,82.438 93.655,82.429 93.678,82.419 93.701,82.407 93.721,82.393 93.74,82.38
  region net ALRT: 96.47,82.349 96.612,82.208 96.631,82.224 96.651,82.236 96.674,82.247 96.697,82.255 96.722,82.26 96.747,82.265 96.798,82.269 96.532,82.535 96.528,82.484 96.523,82.459 96.517,82.435 96.509,82.411 96.499,82.388 96.486,82.368
  region net ALRT: 92.505,82.756 92.705,82.756 92.707,82.78 92.712,82.804 92.721,82.827 92.732,82.849 92.745,82.871 92.76,82.892 92.792,82.931 92.417,82.931 92.449,82.892 92.464,82.871 92.477,82.849 92.489,82.827 92.497,82.804 92.503,82.78
  region net $2N2176: 90.093,90.691 89.914,90.87 89.898,90.856 89.879,90.842 89.859,90.829 89.836,90.817 89.813,90.807 89.79,90.798 89.768,90.792 89.747,90.789 90.012,90.524 90.015,90.545 90.021,90.567 90.03,90.59 90.04,90.613 90.052,90.636 90.065,90.656 90.079,90.675
  region net $2N2176: 91.2,91.359 91.2,91.105 91.222,91.104 91.245,91.1 91.269,91.095 91.293,91.088 91.317,91.079 91.339,91.068 91.359,91.057 91.375,91.044 91.375,91.419 91.359,91.406 91.339,91.395 91.317,91.385 91.293,91.376 91.269,91.369 91.245,91.363 91.222,91.36
  region net DN1: 87.056,89.565 87.235,89.745 87.221,89.761 87.207,89.779 87.194,89.8 87.182,89.823 87.172,89.845 87.163,89.868 87.157,89.891 87.154,89.912 86.889,89.646 86.91,89.644 86.932,89.638 86.955,89.629 86.978,89.619 87.001,89.607 87.021,89.594 87.04,89.58
  region net DP1: 84.466,88.186 84.666,88.186 84.668,88.21 84.673,88.234 84.682,88.257 84.693,88.279 84.706,88.301 84.721,88.322 84.753,88.361 84.378,88.361 84.41,88.322 84.425,88.301 84.439,88.279 84.45,88.257 84.458,88.234 84.464,88.21
  region net DN1: 94.395,82.835 94.216,82.655 94.231,82.643 94.294,82.603 94.315,82.589 94.332,82.574 94.344,82.558 94.349,82.541 94.615,82.806 94.596,82.807 94.579,82.807 94.548,82.803 94.506,82.797 94.494,82.796 94.482,82.795 94.47,82.796 94.458,82.798 94.446,82.801 94.434,82.806 94.421,82.813 94.409,82.823
  region net DP1: 92.093,81.726 92.235,81.585 92.254,81.6 92.274,81.613 92.297,81.624 92.32,81.631 92.345,81.637 92.37,81.642 92.421,81.646 92.155,81.912 92.151,81.861 92.146,81.836 92.14,81.812 92.133,81.788 92.122,81.765 92.109,81.745
  region net VCC: 85.566,89.526 85.564,89.47 85.561,89.431 85.556,89.396 85.552,89.38 85.547,89.367 85.541,89.355 85.535,89.346 85.528,89.34 85.519,89.338 85.51,89.339 85.499,89.345 85.487,89.355 85.134,89.002 85.166,88.968 85.197,88.93 85.238,88.874 85.278,88.814 85.326,88.732 85.38,88.627 85.428,88.516 85.471,88.403 85.507,88.289 85.531,88.195 85.549,88.105 85.559,88.035 85.565,87.969 85.566,87.923
  region net VCC: 93.632,86.346 93.633,86.375 93.635,86.403 93.64,86.43 93.646,86.457 93.653,86.483 93.663,86.508 93.673,86.532 93.685,86.555 93.699,86.578 93.714,86.6 93.73,86.621 93.747,86.641 93.765,86.66 93.785,86.679 93.816,86.705 93.849,86.728 93.884,86.75 93.921,86.77 93.959,86.787 93.999,86.803 94.04,86.816 94.082,86.826 94.124,86.835 94.168,86.841 94.211,86.845 94.255,86.846 94.255,87.346 93.755,87.096 93.378,86.346
  region net 3.3V: 92.428,91.726 92.075,91.373 92.605,91.196 93.532,90.769
  region net B-: 102.181,89.919 102.256,89.917 102.327,89.911 102.396,89.901 102.461,89.888 102.525,89.87 102.586,89.85 102.645,89.826 102.703,89.799 102.758,89.77 102.823,89.73 102.886,89.688 102.957,89.634 103.046,89.558 103.172,89.439 103.558,89.037 103.59,89.005 104.297,89.712 104.244,89.769 104.18,89.844 104.106,89.94 104.022,90.061 103.922,90.227 103.816,90.423 103.71,90.648 103.615,90.881 103.533,91.116 103.471,91.328 103.432,91.496 103.406,91.64 103.391,91.76 103.384,91.857 103.383,91.919 102.383,91.919 102.386,91.826 102.398,91.71 102.444,91.424 102.465,91.286 102.47,91.232 102.471,91.181 102.47,91.149 102.467,91.118 102.462,91.09 102.459,91.076 102.455,91.063 102.45,91.051 102.444,91.038 102.438,91.027 102.431,91.016 102.424,91.005 102.416,90.995 102.406,90.986 102.397,90.977 102.386,90.969 102.374,90.961 102.362,90.954 102.348,90.948 102.334,90.942 102.318,90.937 102.302,90.932 102.266,90.925 102.226,90.921 102.181,90.919

## Silkscreen, mask and mechanical layers (free items; w line width, h text height)
Top Silkscreen Layer:
  lines w0.254: 105.908,77.835 ccw(c107.178,77.835) 107.178,76.565 114.417,76.565 ccw(c114.417,77.835) 115.687,77.835 ccw(c114.417,77.835) 114.417,79.105 107.178,79.105 ccw(c107.178,77.835) 105.908,77.835 ; 105.916,100.668 ccw(c107.186,100.668) 107.186,99.398 114.425,99.398 ccw(c114.425,100.668) 115.695,100.668 ccw(c114.425,100.668) 114.425,101.938 107.186,101.938 ccw(c107.186,100.668) 105.916,100.668
  text "V2.2" at 109.305,99.696 h1.7
  text "NanoCellC3" at 106.305,76.896 h1.7
Bottom Silkscreen Layer:
  drawing of 41 lines, arcs and shapes, not listed
  text "9" at 87.042,98.058 h1.45
  text "8" at 89.582,98.058 h1.45
  text "7" at 92.082,98.058 h1.45
  text "6" at 94.622,98.058 h1.45
  text "5" at 97.282,98.058 h1.45
  text "4" at 99.822,98.058 h1.45
  text "3V" at 82.356,98.046 h1.47
  text "EN" at 84.896,98.046 h1.47
  text "B-" at 102.756,98.046 h1.47
  text "B+" at 105.356,98.046 h1.47
  text "frapais.lab" at 114.881,95.473 h3.5 r90
  text "+" at 106.105,91.196 h5
  text "-" at 107.105,86.596 h5 r90
  text "D-" at 92.567,80.798 h1.45
  text "D+" at 95.105,80.796 h1.45
  text "SCL" at 98.005,80.796 h1.45
  text "SDA" at 101.205,80.796 h1.45
  text "RX" at 87.605,80.696 h1.45
  text "TX" at 90.205,80.696 h1.45
  text "1" at 102.282,78.858 h1.45
  text "0" at 104.882,78.858 h1.45
  text "5V" at 82.456,78.846 h1.47
  text "GND" at 85.605,78.796 h1.45
  text "18" at 92.505,78.796 h1.47
  text "19" at 95.005,78.796 h1.47
  text "3" at 97.182,78.758 h1.45
  text "2" at 99.842,78.758 h1.45
  text "21" at 89.956,78.746 h1.47
  text "20" at 87.705,78.696 h1.47